# EAGLE board Diversity (EAGLE 6.5.0)

Size 100 x 80 mm. Coordinates in mm from the lower left corner, seen from the top.
Outline: 0,0 100,0 100,80 0,80 0,0
Copper layers (1*16): Top 0.035mm / dielectric 1.5mm / Bottom 0.035mm
Design rules "default": minimum track width 10mil, minimum drill 24mil, track to track 8mil, track to pad 8mil, pad to pad 8mil, via to via 8mil, smd to smd 8mil, copper to edge 40mil, drill to drill 8mil, minimum pad ring 10mil, minimum via ring 8mil, stop-mask expansion 4mil, vias tented up to drill 0mil, thermal gap 10mil

## Footprints (pad centres in the part's own frame; a part is rotated, then mirrored left to right if it is on the bottom)
C2.5-2 = drill 0.813 pad 1.6 octagon: 1 -1.27,0; 2 1.27,0
E3,5-8 = drill 0.813 pad 1.6: + -1.778,0 | drill 0.813 pad 1.6 octagon: - 1.778,0
E2,5-5 = drill 0.813 pad 1.6: + -1.27,0 | drill 0.813 pad 1.6 octagon: - 1.27,0
DO41-10 = drill 1.118: A 5.08,0; C -5.08,0
DIL08 = drill 0.813 long: 1 -3.81,-3.81; 2 -1.27,-3.81; 3 1.27,-3.81; 4 3.81,-3.81; 5 3.81,3.81; 6 1.27,3.81; 7 -1.27,3.81; 8 -3.81,3.81
TO220V = drill 1.016 long: 1 -2.54,-2.54; 2 0,-2.54; 3 2.54,-2.54
DIL08' = drill 0.813 pad 1.27: 1 -3.81,-3.81; 2 -1.27,-3.81; 3 1.27,-3.81; 4 3.81,-3.81; 5 3.81,3.81; 6 1.27,3.81; 7 -1.27,3.81; 8 -3.81,3.81
DIL40 = drill 0.813 long: 1 -24.13,-7.62; 2 -21.59,-7.62; 3 -19.05,-7.62; 4 -16.51,-7.62; 5 -13.97,-7.62; 6 -11.43,-7.62; 7 -8.89,-7.62; 8 -6.35,-7.62; 9 -3.81,-7.62; 10 -1.27,-7.62; 11 1.27,-7.62; 12 3.81,-7.62; 13 6.35,-7.62; 14 8.89,-7.62; 15 11.43,-7.62; 16 13.97,-7.62; 17 16.51,-7.62; 18 19.05,-7.62; 19 21.59,-7.62; 20 24.13,-7.62; 21 24.13,7.62; 22 21.59,7.62; 23 19.05,7.62; 24 16.51,7.62; 25 13.97,7.62; 26 11.43,7.62; 27 8.89,7.62; 28 6.35,7.62; 29 3.81,7.62; 30 1.27,7.62; 31 -1.27,7.62; 32 -3.81,7.62; 33 -6.35,7.62; 34 -8.89,7.62; 35 -11.43,7.62; 36 -13.97,7.62; 37 -16.51,7.62; 38 -19.05,7.62; 39 -21.59,7.62; 40 -24.13,7.62
DIL16 = drill 0.813 long: 1 -8.89,-3.81; 2 -6.35,-3.81; 3 -3.81,-3.81; 4 -1.27,-3.81; 5 1.27,-3.81; 6 3.81,-3.81; 7 6.35,-3.81; 8 8.89,-3.81; 9 8.89,3.81; 10 6.35,3.81; 11 3.81,3.81; 12 1.27,3.81; 13 -1.27,3.81; 14 -3.81,3.81; 15 -6.35,3.81; 16 -8.89,3.81
SPC4077 = drill 0.8 pad 2.184 long: 1 -3,0; 2 0,-4.8 | drill 1 pad 2.184 long: 3 3,0
HC49U-V = drill 0.813: 1 -2.413,0; 2 2.413,0
0207/7 = drill 0.813 octagon: 1 -3.81,0; 2 3.81,0
B3F-10XX = drill 1.016 long: 1 -3.251,2.261; 2 3.251,2.261; 3 -3.251,-2.261; 4 3.251,-2.261
DIP254P762X533-8 = drill 1.118 square: 1 -7.62,7.62 | drill 1.118: 2 -7.62,5.08; 3 -7.62,2.54; 4 -7.62,0; 5 0,0; 6 0,2.54; 7 0,5.08; 8 0,7.62
RCA-4-117-01 = drill 1.2 pad 2.184: 1 9,3.1; 2 5,0; 3 13,-1.25; 4 -9,3.1; 5 -13,0; 6 -5,-1.25

## Placement (x,y rotation side)
C1  100nF  [C2.5-2]  60.96,45.72 90 top
C2  100nF  [C2.5-2]  72.39,45.72 90 top
C3  100nF  [C2.5-2]  21.59,5.08 90 top
C4  100nF  [C2.5-2]  15.24,63.5 0 top
C5  100n  [C2.5-2]  21.59,52.07 0 top
C6  100n  [C2.5-2]  38.1,55.88 0 top
C7  1uF  [C2.5-2]  26.67,5.08 90 top
C8  1uF  [C2.5-2]  -77.47,92.71 0 top  (outside the outline)
C9  1uF  [C2.5-2]  15.24,8.89 0 top
C10  1uF  [C2.5-2]  15.24,24.13 0 top
C11  1uF  [C2.5-2]  16.51,16.51 0 top
C12  [E3,5-8]  22.86,59.69 0 top
C13  [E2,5-5]  -93.98,99.06 0 top  (outside the outline)
C14  1uF  [C2.5-2]  16.51,34.29 0 top
C15  100nF  [C2.5-2]  46.99,45.72 90 top
C16  100nF  [C2.5-2]  33.02,45.72 90 top
C17  100nF  [C2.5-2]  15.24,12.7 0 top
C18  100nF  [C2.5-2]  15.24,27.94 0 top
C19  1uF  [C2.5-2]  16.51,53.34 0 top
C20  1uF  [C2.5-2]  63.5,50.8 0 top
C21  100n  [C2.5-2]  36.83,63.5 0 top
C22  22pF  [C2.5-2]  45.72,5.08 90 top
C23  22pF  [C2.5-2]  68.58,5.08 90 top
C24  1uF  [C2.5-2]  54.61,46.99 0 top
C25  1uF  [C2.5-2]  52.07,67.31 0 top
C26  10uF  [C2.5-2]  85.09,17.78 0 top
C27  1uF  [C2.5-2]  81.28,36.83 0 top
C28  22uF  [C2.5-2]  82.55,44.45 0 top
C29  1uF  [C2.5-2]  81.28,54.61 0 top
C30  22uF  [C2.5-2]  83.82,77.47 0 top
D1  1N4004  [DO41-10]  -71.12,82.55 0 top  (outside the outline)
IC1  LM1881  [DIL08]  59.69,34.29 0 top
IC2  LM1881  [DIL08]  72.39,34.29 0 top
IC3  7805TV  [TO220V]  29.21,55.88 0 top
IC4  NE5532N  [DIL08']  -92.71,71.12 0 top  (outside the outline)
IC5  LM1881  [DIL08]  46.99,34.29 0 top
IC6  LM1881  [DIL08]  34.29,34.29 0 top
IC7  MEGA16-P  [DIL40]  52.07,17.78 0 top
IC9  4052N  [DIL16]  54.61,55.88 180 top
J1  [SPC4077]  -91.44,53.34 0 top  (outside the outline)
Q2  16MHz  [HC49U-V]  57.15,5.08 180 top
R1  680k  [0207/7]  17.78,41.91 0 top
R2  680k  [0207/7]  -27.94,105.41 0 top  (outside the outline)
R3  75  [0207/7]  36.83,3.81 180 top
R4  680k  [0207/7]  46.99,41.91 0 top
R5  680k  [0207/7]  33.02,41.91 0 top
R6  75  [0207/7]  -68.58,105.41 0 top  (outside the outline)
R7  75  [0207/7]  -78.74,105.41 0 top  (outside the outline)
R8  75  [0207/7]  -88.9,105.41 0 top  (outside the outline)
R9  10k  [0207/7]  17.78,38.1 180 top
R10  10k  [0207/7]  17.78,20.32 180 top
R11  10k  [0207/7]  -38.1,110.49 0 top  (outside the outline)
R12  10k  [0207/7]  -48.26,110.49 0 top  (outside the outline)
R13  100k  [0207/7]  38.1,74.93 180 top
R14  10k  [0207/7]  -68.58,110.49 0 top  (outside the outline)
R15  10k  [C2.5-2]  25.4,58.42 0 top
R16  3,3k  [C2.5-2]  20.32,46.99 0 top
R17  100k  [0207/7]  38.1,71.12 0 top
R18  1k  [0207/7]  69.85,53.34 180 top
R19  1k  [0207/7]  77.47,49.53 180 top
R20  4,7k  [0207/7]  86.36,38.1 270 top
R21  75  [0207/7]  86.36,48.26 270 top
R22  4,7k  [0207/7]  86.36,60.96 270 top
R23  75  [0207/7]  86.36,71.12 90 top
R24  100k  [0207/7]  27.94,71.12 180 top
R25  100k  [0207/7]  20.32,67.31 180 top
S1  [B3F-10XX]  82.55,5.08 0 top
U1  AD812ANZ  [DIP254P762X533-8]  27.94,77.47 90 top
X1  RCA-4-117-01  [RCA-4-117-01]  10.16,58.42 90 top
X2  RCA-4-117-01  [RCA-4-117-01]  10.16,21.59 90 top
X3  RCA-4-117-01  [RCA-4-117-01]  90.17,55.88 270 top

## Library data of the parts
C1-C11 C14-C30 R15 R16 = capacitor-wima
C12 C13 = rcl
D1 = diode
IC1 IC2 IC5 IC6 = lm1881
IC3 IC4 = linear
IC7 = atmel; MPN: ATMEGA16-16PU; OC_FARNELL: 9171142; OC_NEWARK: 01M6885
IC9 = 40xx
J1 = con-jack; OC_FARNELL: unknown; OC_NEWARK: unknown
Q2 = adafruit; OC_FARNELL: 1666969; OC_NEWARK: unknown
R1-R14 R17-R25 = resistor
S1 = switch-omron; MPN: B3F-1000; OC_FARNELL: 176432; OC_NEWARK: 36M3542
U1 = ADI-Phase-2; MPN: AD812ANZ; OC_FARNELL: 1424069; OC_NEWARK: 59K6382; PACKAGE: DIP-8; SUPPLIER: Analog Devices
X1-X3 = con-conrad

## Nets
+5V: C6.1 C13.+ C21.2 IC3.3 IC7.10 IC7.30 IC7.32 IC9.16 R14.2
+12V: D1.A IC1.8 IC2.8 IC4.8 IC5.8 IC6.8 J1.3 R15.2 R17.1 R24.1 U1.8
A0: R15.1 R16.2
A1: C19.2 R11.2 X1.6
A2: C20.2 R12.1 X1.3
A3: C11.1 R10.2 X2.6
A4: C14.1 R9.2 X2.3
GND: C1.2 C2.2 C5.2 C6.2 C12.- C13.- C15.2 C16.2 C21.1 C22.1 C23.1 C26.1 IC1.4 IC2.4 IC3.2 IC4.4 IC5.4 IC6.4 IC7.11 IC7.31 IC9.6 IC9.7 IC9.8 J1.1 J1.2 R1.1 R2.1 R3.1 R4.1 R5.1 R6.1 R7.2 R8.2 R9.1 R10.1 R11.1 R12.2 R13.2 R16.1 R25.2 S1.3 X1.1 X1.4 X2.1 X2.4 X3.1 X3.4
N$1: IC1.3 IC7.24
N$2: IC2.3 IC7.23
N$3: C4.1 C8.1 R6.2 X1.2
N$4: C4.2 IC1.2
N$5: C3.2 IC2.2
N$6: C7.2 IC9.1
N$7: C3.1 C7.1 R3.2 X1.5
N$8: C5.1 C12.+ D1.C IC3.1
N$9: C2.1 IC2.6 R2.2
N$10: C1.1 IC1.6 R1.2
N$11: C8.2 IC9.5
N$12: C9.2 IC9.2
N$13: C25.2 IC9.3
N$14: IC5.3 IC7.25
N$15: IC6.3 IC7.26
N$16: C11.2 IC9.15
N$17: C16.1 IC6.6 R5.2
N$18: C15.1 IC5.6 R4.2
N$19: C17.2 IC5.2
N$20: C9.1 C17.1 R7.1 X2.5
N$21: IC7.27 IC9.9
N$22: C18.2 IC6.2
N$23: C10.1 C18.1 R8.1 X2.2
N$25: C10.2 IC9.4
N$26: IC7.28 IC9.10
N$27: C24.2 IC9.13
N$28: C14.2 IC9.11
N$29: C19.1 IC9.12
N$30: C20.1 IC9.14
N$31: C25.1 R13.1 R17.2 U1.3
N$32: C26.2 R18.2
N$33: IC7.9 R14.1 S1.2
N$34: C23.2 IC7.13 Q2.1
N$35: C22.2 IC7.12 Q2.2
N$36: R18.1 R19.2 U1.2 U1.4 U1.5
N$37: C28.1 R19.1 U1.1
N$39: R20.1 X3.3
N$40: R21.1 X3.2
N$41: R22.1 X3.6
N$42: R23.1 X3.5
N$43: C27.2 R20.2
N$44: C28.2 R21.2
N$45: C29.2 R22.2
N$46: C30.2 R23.2
N$47: C24.1 IC4.3 R24.2 R25.1
N$48: C30.1 U1.6 U1.7
N$49: C27.1 C29.1 IC4.1 IC4.2

## Tracks (layer width: path | path; a pad name or v marks a point on that pad's centre or on a via)
+5V  (8 unrouted)
+12V  (10 unrouted)
A0  (1 unrouted)
A1  (2 unrouted)
A2  (2 unrouted)
A3  (2 unrouted)
A4  (2 unrouted)
GND  (46 unrouted)
N$1  (1 unrouted)
N$2  (1 unrouted)
N$3  (3 unrouted)
N$4  (1 unrouted)
N$5  (1 unrouted)
N$6  (1 unrouted)
N$7  (3 unrouted)
N$8  (3 unrouted)
N$9  (2 unrouted)
N$10  (2 unrouted)
N$11  (1 unrouted)
N$12  (1 unrouted)
N$13  (1 unrouted)
N$14  (1 unrouted)
N$15  (1 unrouted)
N$16  (1 unrouted)
N$17  (2 unrouted)
N$18  (2 unrouted)
N$19  (1 unrouted)
N$20  (3 unrouted)
N$21  (1 unrouted)
N$22  (1 unrouted)
N$23  (3 unrouted)
N$25  (1 unrouted)
N$26  (1 unrouted)
N$27  (1 unrouted)
N$28  (1 unrouted)
N$29  (1 unrouted)
N$30  (1 unrouted)
N$31  (3 unrouted)
N$32  (1 unrouted)
N$33  (2 unrouted)
N$34  (2 unrouted)
N$35  (2 unrouted)
N$36  (4 unrouted)
N$37  (2 unrouted)
N$39  (1 unrouted)
N$40  (1 unrouted)
N$41  (1 unrouted)
N$42  (1 unrouted)
N$43  (1 unrouted)
N$44  (1 unrouted)
N$45  (1 unrouted)
N$46  (1 unrouted)
N$47  (3 unrouted)
N$48  (2 unrouted)
N$49  (3 unrouted)